# EAGLE board AlphanumericDisplay (EAGLE 7.6.0)
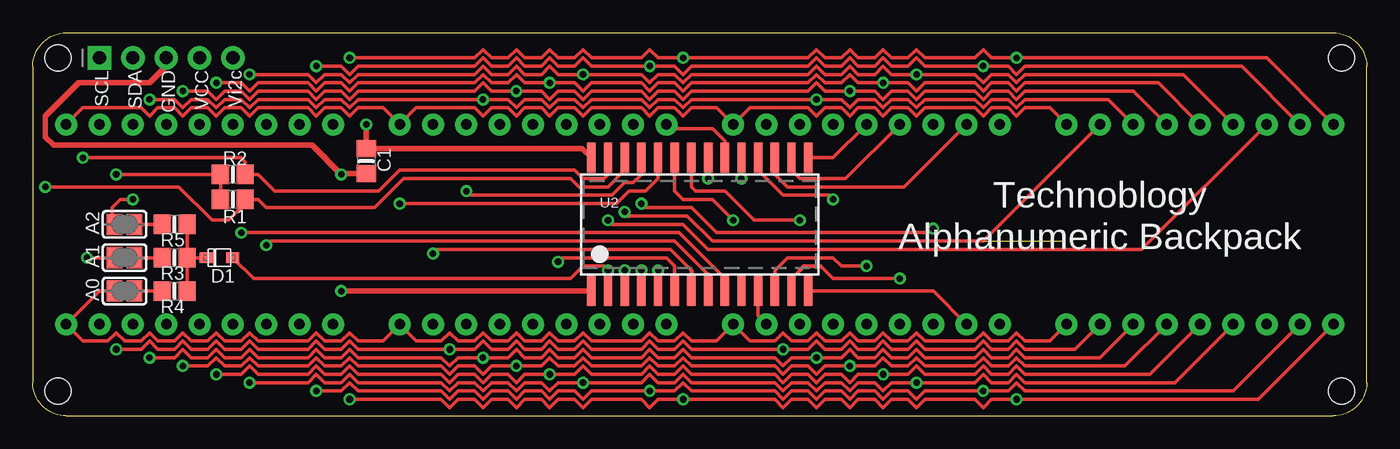
[diagram p0: board, top side]
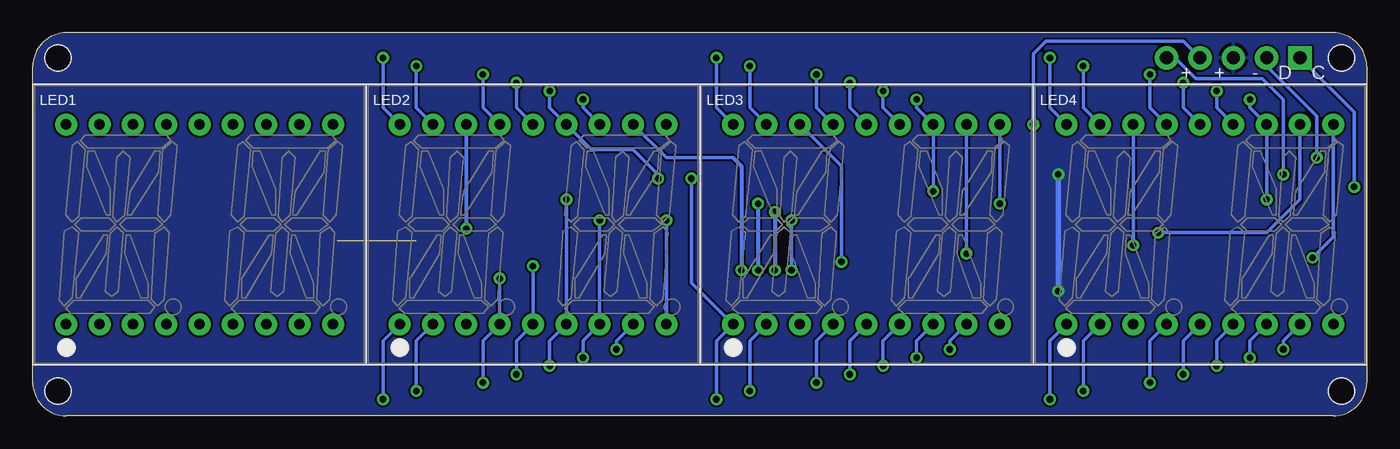
[diagram p1: board, bottom side, seen from below]

Size 101.6 x 29.21 mm. Coordinates in mm from the lower left corner, seen from the top.
Outline: 0,26.67 arc-90 2.54,29.21 99.06,29.21 arc-90 101.6,26.67 101.6,2.54 arc-90 99.06,0 2.54,0 arc-90 0,2.54 0,26.67
Copper layers (1*16): Top 0.035mm / dielectric 1.5mm / Bottom 0.035mm
Design rules "default *": minimum track width 8mil, minimum drill 15mil, track to track 6mil, track to pad 8mil, pad to pad 8mil, via to via 8mil, smd to smd 8mil, copper to edge 1mil, drill to drill 8mil, minimum pad ring 10mil, minimum via ring 8mil, stop-mask expansion 4mil, vias tented up to drill 20mil, thermal gap 10mil
Holes 2 mm at 1.91,1.91 99.69,1.91 1.91,27.3 99.69,27.3

## Footprints (pad centres in the part's own frame; a part is rotated, then mirrored left to right if it is on the bottom)
SOLDERJUMPER_REFLOW_NOPASTE = smd 1.168 x 1.6: 1 -0.762,0; 2 0.762,0
0805-NO = smd 1.3 x 1.5: 1 -0.95,0; 2 0.95,0
SOD-323F = smd 1 x 0.8: A -1,0; C 1,0
1X05_ROUND_70 = drill 1 pad 1.778 square: 1 -5.08,0 | drill 1 pad 1.778: 2 -2.54,0; 3 0,0; 4 2.54,0; 5 5.08,0
SEGMENT_STARTBUST_DUAL_KWA-541CBB = drill 0.8 pad 1.676: 1 -10.16,-7.62; 2 -7.62,-7.62; 3 -5.08,-7.62; 4 -2.54,-7.62; 5 0,-7.62; 6 2.54,-7.62; 7 5.08,-7.62; 8 7.62,-7.62; 9 10.16,-7.62; 10 10.16,7.62; 11 7.62,7.62; 12 5.08,7.62; 13 2.54,7.62; 14 0,7.62; 15 -2.54,7.62; 16 -5.08,7.62; 17 -7.62,7.62; 18 -10.16,7.62
SOP28_300MIL = smd 0.635 x 2.286: P$1 -8.255,-5.08; P$2 -6.985,-5.08; P$3 -5.715,-5.08; P$4 -4.445,-5.08; P$5 -3.175,-5.08; P$6 -1.905,-5.08; P$7 -0.635,-5.08; P$8 0.635,-5.08; P$9 1.905,-5.08; P$10 3.175,-5.08; P$11 4.445,-5.08; P$12 5.715,-5.08; P$13 6.985,-5.08; P$14 8.255,-5.08; P$15 8.255,5.08; P$16 6.985,5.08; P$17 5.715,5.08; P$18 4.445,5.08; P$19 3.175,5.08; P$20 1.905,5.08; P$21 0.635,5.08; P$22 -0.635,5.08; P$23 -1.905,5.08; P$24 -3.175,5.08; P$25 -4.445,5.08; P$26 -5.715,5.08; P$27 -6.985,5.08; P$28 -8.255,5.08

## Placement (x,y rotation side)
A0  [SOLDERJUMPER_REFLOW_NOPASTE]  6.99,9.53 180 top
A1  [SOLDERJUMPER_REFLOW_NOPASTE]  6.99,12.06 180 top
A2  [SOLDERJUMPER_REFLOW_NOPASTE]  6.99,14.61 180 top
C1  10uF  [0805-NO]  25.4,19.43 270 top
D1  1N4148  [SOD-323F]  14.22,12.06 180 top
JP1  [1X05_ROUND_70]  10.16,27.3 0 top
LED1  [SEGMENT_STARTBUST_DUAL_KWA-541CBB]  88.9,14.61 0 bottom
LED2  [SEGMENT_STARTBUST_DUAL_KWA-541CBB]  63.5,14.61 0 bottom
LED3  [SEGMENT_STARTBUST_DUAL_KWA-541CBB]  38.1,14.61 0 bottom
LED4  [SEGMENT_STARTBUST_DUAL_KWA-541CBB]  12.7,14.61 0 bottom
R1  10K  [0805-NO]  15.24,16.51 0 top
R2  10K  [0805-NO]  15.24,18.41 0 top
R3  47K  [0805-NO]  10.79,12.06 180 top
R4  47K  [0805-NO]  10.79,9.53 180 top
R5  47K  [0805-NO]  10.79,14.61 180 top
U2  [SOP28_300MIL]  50.8,14.61 0 top

## Library data of the parts
A0 A1 A2 C1 JP1 LED1-LED4 R1-R5 U2 = microbuilder
D1 = adafruit

## Nets
A0: A0.2 LED1.9 LED2.9 LED3.9 LED4.9 U2.P$23
A1: A1.2 LED1.10 LED2.10 LED3.10 LED4.10 U2.P$24
A2: A2.2 LED1.12 LED2.12 LED3.12 LED4.12 U2.P$25
COM0: D1.A LED1.16 U2.P$2
COM1: LED1.11 U2.P$3
COM2: LED2.16 U2.P$4
COM3: LED2.11 U2.P$5
COM4: LED3.16 U2.P$6
COM5: LED3.11 U2.P$7
GND: C1.2 JP1.3 U2.P$1
N$1: D1.C R3.1 R4.1 R5.1
N$2: JP1.5 R1.1 R2.1
N$4: LED1.17 LED2.17 LED3.17 LED4.17 U2.P$17
N$5: LED1.15 LED2.15 LED3.15 LED4.15 U2.P$16
N$6: LED1.14 LED2.14 LED3.14 LED4.14 U2.P$15
N$7: A2.1 R5.2
N$8: LED1.2 LED2.2 LED3.2 LED4.2 U2.P$14
N$9: LED1.4 LED2.4 LED3.4 LED4.4 U2.P$13
N$10: LED1.7 LED2.7 LED3.7 LED4.7 U2.P$22
N$11: LED1.1 LED2.1 LED3.1 LED4.1 U2.P$21
N$12: LED1.18 LED2.18 LED3.18 LED4.18 U2.P$20
N$13: LED1.13 LED2.13 LED3.13 LED4.13 U2.P$19
N$14: LED1.5 LED2.5 LED3.5 LED4.5 U2.P$12
N$15: LED1.8 LED2.8 LED3.8 LED4.8 U2.P$11
N$16: LED1.6 LED2.6 LED3.6 LED4.6 U2.P$18
N$19: A1.1 R3.2
N$20: A0.1 R4.2
N$23: LED4.16 U2.P$8
N$24: LED4.11 U2.P$9
SCL: JP1.1 R1.2 U2.P$26
SDA: JP1.2 R2.2 U2.P$27
VDD: C1.1 JP1.4 U2.P$28

## Tracks (layer width: path | path; a pad name or v marks a point on that pad's centre or on a via)
A0  (via drill 0.5)
  Top 0.254: LED1.9 77.47,5.71 75.56,5.71 74.93,6.35 74.3,5.71 73.03,5.71 72.39,6.35 71.75,5.71 67.94,5.71 67.31,6.35 66.67,5.71 65.41,5.71 64.77,6.35 64.14,5.71 62.87,5.71 62.23,6.35 61.59,5.71 60.33,5.71 59.69,6.35 59.05,5.71 57.78,5.71 57.15,6.35 56.52,5.71 54.61,5.71 LED2.9 52.07,5.71 50.16,5.71 49.53,6.35 48.9,5.71 47.62,5.71 46.99,6.35 46.35,5.71 42.55,5.71 41.91,6.35 41.27,5.71 40.01,5.71 39.37,6.35 38.73,5.71 37.47,5.71 36.83,6.35 36.2,5.71 34.92,5.71 34.29,6.35 33.66,5.71 32.38,5.71 31.75,6.35 31.11,5.71 29.21,5.71 LED3.9 26.67,5.71 24.77,5.71 24.13,6.35 23.5,5.71 22.23,5.71 21.59,6.35 20.95,5.71 17.14,5.71 16.51,6.35 15.88,5.71 14.61,5.71 13.97,6.35 13.34,5.71 12.06,5.71 11.43,6.35 10.79,5.71 9.53,5.71 8.89,6.35 8.26,5.71 6.99,5.71 6.35,6.35 5.71,5.71 3.81,5.71 LED4.9 5.08,9.53 A0.2 | U2.P$23 48.9,17.14 49.53,16.51 51.75,16.51 v53.34,14.92
  Bottom 0.254: v53.34,14.92 LED2.9
A1  (via drill 0.5)
  Top 0.254: LED4.10 3.81,23.5 8.26,23.5 8.89,22.86 9.53,23.5 10.79,23.5 11.43,22.86 12.06,23.5 13.34,23.5 13.97,22.86 14.61,23.5 15.88,23.5 16.51,22.86 17.14,23.5 20.95,23.5 21.59,22.86 22.23,23.5 23.5,23.5 24.13,22.86 24.77,23.5 26.67,23.5 LED3.10 29.21,23.5 33.66,23.5 34.29,22.86 34.92,23.5 36.2,23.5 36.83,22.86 37.47,23.5 38.73,23.5 39.37,22.86 40.01,23.5 41.27,23.5 41.91,22.86 42.55,23.5 46.35,23.5 46.99,22.86 47.62,23.5 48.9,23.5 49.53,22.86 50.16,23.5 52.07,23.5 LED2.10 54.61,23.5 59.05,23.5 59.69,22.86 60.33,23.5 61.59,23.5 62.23,22.86 62.87,23.5 64.14,23.5 64.77,22.86 65.41,23.5 66.67,23.5 67.31,22.86 67.94,23.5 71.75,23.5 72.39,22.86 73.03,23.5 74.3,23.5 74.93,22.86 75.56,23.5 77.47,23.5 LED1.10 | v27.94,16.19 44.45,16.19 45.4,17.14 46.67,17.14 47.62,18.1 U2.P$24 | A1.2 v4.13,12.06
  Bottom 0.254: v27.94,16.19 LED3.10 | v4.13,12.06 2.54,13.65 LED4.10
A2  (via drill 0.5)
  Top 0.254: 6.48,14.61 A2.2 6.03,14.8 6.03,15.88 6.67,16.51 v7.62,16.51 | v8.89,24.13 10.79,24.13 11.43,23.5 12.06,24.13 13.34,24.13 13.97,23.5 14.61,24.13 15.88,24.13 16.51,23.5 17.14,24.13 20.95,24.13 21.59,23.5 22.23,24.13 23.5,24.13 24.13,23.5 24.77,24.13 v34.29,24.13 36.2,24.13 36.83,23.5 37.47,24.13 38.73,24.13 39.37,23.5 40.01,24.13 41.27,24.13 41.91,23.5 42.55,24.13 46.35,24.13 46.99,23.5 47.62,24.13 48.9,24.13 49.53,23.5 50.16,24.13 v59.69,24.13 61.59,24.13 62.23,23.5 62.87,24.13 64.14,24.13 64.77,23.5 65.41,24.13 66.67,24.13 67.31,23.5 67.94,24.13 71.75,24.13 72.39,23.5 73.03,24.13 74.3,24.13 74.93,23.5 75.56,24.13 81.92,24.13 LED1.12 | U2.P$25 46.35,18.41 45.72,17.78 45.09,17.78 44.13,16.83 33.34,16.83 v33.02,17.14
  Bottom 0.254: LED2.12 59.69,23.5 v59.69,24.13 | v34.29,24.13 34.29,23.5 LED3.12 v33.02,17.14 | v8.89,24.13 8.89,23.5 LED4.12 v7.62,16.51
COM0  (via drill 0.5)
  Top 0.254: v43.81,14.92 44.13,14.61 49.53,14.61 51.44,12.7 83.82,12.7 84.45,12.7 LED1.16 | U2.P$2 v43.81,11.11 43.5,11.43 41.91,11.43 40.96,10.48 16.81,10.48 D1.A
  Bottom 0.254: v43.81,14.92 v43.81,11.11
COM1  (via drill 0.5)  (1 unrouted)
  Top 0.254: 45.4,15.24 49.85,15.24 51.75,13.34 72.39,13.34 LED1.11
  Top 0.305: 45.4,15.24 v45.09,15.56 | v45.09,11.11 U2.P$3
  Bottom 0.305: v45.09,15.56 v45.09,11.11
COM2  (via drill 0.5)
  Top 0.254: v46.35,16.19 46.67,15.88 50.16,15.88 52.07,13.97 68.26,13.97 v68.58,14.29
  Top 0.305: v46.35,11.11 U2.P$4
  Bottom 0.305: LED2.16 v68.58,14.29 | v46.35,16.19 v46.35,11.11
COM3  (via drill 0.5)
  Top 0.305: v47.62,11.11 U2.P$5
  Bottom 0.254: LED2.11 53.34,19.68 48.26,19.68
  Bottom 0.305: 48.26,19.68 47.62,19.05 v47.62,11.11
COM4  (via drill 0.5)
  Top 0.254: U2.P$6 48.9,11.43 48.26,12.06 40.32,12.06 v40.01,11.75
  Bottom 0.254: LED3.16 40.01,19.05 v40.01,11.75
COM5  (via drill 0.5)
  Top 0.254: 50.16,11.11 48.58,12.7 30.8,12.7 v30.48,12.38
  Top 0.305: 50.16,11.11 U2.P$7
  Bottom 0.254: LED3.11 v30.48,12.38
GND  (via drill 0.5)
  Top 0.406: C1.2 23.56,18.48 v23.5,18.41 21.27,20.64 1.59,20.64 0.95,21.27 0.95,22.86 3.49,25.4 8.89,25.4 10.16,26.67 JP1.3 | v23.5,9.53 U2.P$1
  Bottom 0.406: v23.5,18.41 v23.5,9.53
  pour Bottom: -0.13,29.27 -0.13,-0.06 101.66,-0.06 101.66,29.27
N$1
  Top 0.254: R3.1 D1.C | R5.1 R3.1 | R3.1 R4.1
N$2  (via drill 0.5)
  Top 0.254: R1.1 14.29,17.78 | 14.29,17.78 R2.1 v6.35,18.41 | 13.97,18.1 14.29,17.78
  Bottom 0.254: JP1.5 14.61,27.3 13.02,25.72 7.94,25.72 6.35,24.13 v6.35,18.41
N$4  (via drill 0.5)
  Top 0.254: v21.59,26.67 23.5,26.67 24.13,26.04 24.77,26.67 33.66,26.67 34.29,27.3 34.92,26.67 36.2,26.67 36.83,27.3 37.47,26.67 38.73,26.67 39.37,27.3 40.01,26.67 41.27,26.67 41.91,27.3 42.55,26.67 v46.99,26.67 48.9,26.67 49.53,26.04 50.16,26.67 59.05,26.67 59.69,27.3 60.33,26.67 61.59,26.67 62.23,27.3 62.87,26.67 64.14,26.67 64.77,27.3 65.41,26.67 66.67,26.67 67.31,27.3 67.94,26.67 v72.39,26.67 74.3,26.67 74.93,26.04 75.56,26.67 92.08,26.67 LED1.17 | 56.52,18.41 57.47,17.46 66.36,17.46 LED2.17
  Top 0.305: U2.P$17 56.52,18.41
  Bottom 0.254: LED2.17 72.39,23.5 v72.39,26.67 | LED3.17 46.99,23.5 v46.99,26.67 | LED4.17 21.59,23.5 v21.59,26.67
N$5  (via drill 0.5)
  Top 0.254: v16.51,26.04 20.95,26.04 21.59,25.4 22.23,26.04 23.5,26.04 24.13,25.4 24.77,26.04 33.66,26.04 34.29,26.67 34.92,26.04 36.2,26.04 36.83,26.67 37.47,26.04 38.73,26.04 39.37,26.67 40.01,26.04 v41.91,26.04 46.35,26.04 46.99,25.4 47.62,26.04 48.9,26.04 49.53,25.4 50.16,26.04 59.05,26.04 59.69,26.67 60.33,26.04 61.59,26.04 62.23,26.67 62.87,26.04 64.14,26.04 64.77,26.67 65.41,26.04 v67.31,26.04 71.75,26.04 72.39,25.4 73.03,26.04 74.3,26.04 74.93,25.4 75.56,26.04 87.63,26.04 LED1.15 | LED2.15 61.91,18.1 58.42,18.1 57.78,18.73 U2.P$16
  Bottom 0.254: LED2.15 67.31,23.5 v67.31,26.04 | LED3.15 41.91,23.5 v41.91,26.04 | LED4.15 16.51,23.5 v16.51,26.04
N$6  (via drill 0.5)
  Top 0.254: v13.97,25.4 15.88,25.4 16.51,24.77 17.14,25.4 20.95,25.4 21.59,24.77 22.23,25.4 23.5,25.4 24.13,24.77 24.77,25.4 33.66,25.4 34.29,26.04 34.92,25.4 36.2,25.4 36.83,26.04 37.47,25.4 v39.37,25.4 41.27,25.4 41.91,24.77 42.55,25.4 46.35,25.4 46.99,24.77 47.62,25.4 48.9,25.4 49.53,24.77 50.16,25.4 59.05,25.4 59.69,26.04 60.33,25.4 61.59,25.4 62.23,26.04 62.87,25.4 v64.77,25.4 66.67,25.4 67.31,24.77 67.94,25.4 71.75,25.4 72.39,24.77 73.03,25.4 74.3,25.4 74.93,24.77 75.56,25.4 85.72,25.4 LED1.14 | LED2.14 60.96,19.68 U2.P$15
  Bottom 0.254: LED2.14 64.77,23.5 v64.77,25.4 | LED3.14 39.37,23.5 v39.37,25.4 | LED4.14 13.97,23.5 v13.97,25.4
N$7
  Top 0.254: A2.1 R5.2
N$8  (via drill 0.5)
  Top 0.254: v21.59,1.91 23.5,1.91 24.13,2.54 24.77,1.91 31.11,1.91 31.75,1.27 32.38,1.91 33.66,1.91 34.29,1.27 34.92,1.91 36.2,1.91 36.83,1.27 37.47,1.91 38.73,1.91 39.37,1.27 40.01,1.91 41.27,1.91 41.91,1.27 42.55,1.91 v46.99,1.91 48.9,1.91 49.53,2.54 50.16,1.91 56.52,1.91 57.15,1.27 57.78,1.91 59.05,1.91 59.69,1.27 60.33,1.91 61.59,1.91 62.23,1.27 62.87,1.91 64.14,1.91 64.77,1.27 65.41,1.91 66.67,1.91 67.31,1.27 67.94,1.91 v72.39,1.91 74.3,1.91 74.93,2.54 75.56,1.91 91.44,1.91 LED1.2 | U2.P$14 68.58,9.53 LED2.2
  Bottom 0.254: LED4.2 21.59,5.71 v21.59,1.91 | LED3.2 46.99,5.71 v46.99,1.91 | LED2.2 72.39,5.71 v72.39,1.91
N$9  (via drill 0.5)
  Top 0.254: v16.51,2.54 20.95,2.54 21.59,3.17 22.23,2.54 23.5,2.54 24.13,3.17 24.77,2.54 31.11,2.54 31.75,1.91 32.38,2.54 33.66,2.54 34.29,1.91 34.92,2.54 36.2,2.54 36.83,1.91 37.47,2.54 38.73,2.54 39.37,1.91 40.01,2.54 v41.91,2.54 46.35,2.54 46.99,3.17 47.62,2.54 48.9,2.54 49.53,3.17 50.16,2.54 56.52,2.54 57.15,1.91 57.78,2.54 59.05,2.54 59.69,1.91 60.33,2.54 61.59,2.54 62.23,1.91 62.87,2.54 64.14,2.54 64.77,1.91 65.41,2.54 v67.31,2.54 71.75,2.54 72.39,3.17 73.03,2.54 74.3,2.54 74.93,3.17 75.56,2.54 87,2.54 LED1.4 | U2.P$13 57.78,10.48 58.42,11.11 | 60.01,11.43 60.96,10.48 v66.04,10.48
  Top 0.305: 58.42,11.11 58.74,11.43 60.01,11.43
  Bottom 0.254: LED4.4 16.51,5.71 v16.51,2.54 | LED3.4 41.91,5.71 v41.91,2.54 | v67.31,2.54 67.31,5.71 LED2.4 v66.04,10.48
N$10  (via drill 0.5)
  Top 0.254: v8.89,4.45 10.79,4.45 11.43,5.08 12.06,4.45 13.34,4.45 13.97,5.08 14.61,4.45 15.88,4.45 16.51,5.08 17.14,4.45 20.95,4.45 21.59,5.08 22.23,4.45 23.5,4.45 24.13,5.08 24.77,4.45 31.11,4.45 31.75,3.81 32.38,4.45 v34.29,4.45 36.2,4.45 36.83,5.08 37.47,4.45 38.73,4.45 39.37,5.08 40.01,4.45 41.27,4.45 41.91,5.08 42.55,4.45 46.35,4.45 46.99,5.08 47.62,4.45 48.9,4.45 49.53,5.08 50.16,4.45 56.52,4.45 57.15,3.81 57.78,4.45 v59.69,4.45 61.59,4.45 62.23,5.08 62.87,4.45 64.14,4.45 64.77,5.08 65.41,4.45 66.67,4.45 67.31,5.08 67.94,4.45 71.75,4.45 72.39,5.08 73.03,4.45 74.3,4.45 74.93,5.08 75.56,4.45 81.28,4.45 LED1.7 | U2.P$22 50.16,17.46 50.48,17.14 52.7,17.14 54.93,14.92 v58.42,14.92
  Bottom 0.254: LED4.7 8.89,5.71 v8.89,4.45 | LED3.7 34.29,5.71 v34.29,4.45 | v59.69,4.45 59.69,5.71 LED2.7 v58.42,14.92
N$11  (via drill 0.5)
  Top 0.254: v24.13,1.27 31.11,1.27 31.75,0.64 32.38,1.27 33.66,1.27 34.29,0.64 34.92,1.27 36.2,1.27 36.83,0.64 37.47,1.27 38.73,1.27 39.37,0.64 40.01,1.27 41.27,1.27 41.91,0.64 42.55,1.27 46.35,1.27 46.99,0.64 47.62,1.27 v49.53,1.27 56.52,1.27 57.15,0.64 57.78,1.27 59.05,1.27 59.69,0.64 60.33,1.27 61.59,1.27 62.23,0.64 62.87,1.27 64.14,1.27 64.77,0.64 65.41,1.27 66.67,1.27 67.31,0.64 67.94,1.27 71.75,1.27 72.39,0.64 73.03,1.27 v74.93,1.27 93.34,1.27 LED1.1 | U2.P$21 v51.44,18.1
  Bottom 0.254: LED4.1 24.13,5.71 v24.13,1.27 | v49.53,1.27 49.53,5.71 LED3.1 51.44,10.16 v51.44,18.1 | LED2.1 74.93,5.71 v74.93,1.27
N$12  (via drill 0.5)
  Top 0.254: v24.13,27.3 33.66,27.3 34.29,27.94 34.92,27.3 36.2,27.3 36.83,27.94 37.47,27.3 38.73,27.3 39.37,27.94 40.01,27.3 41.27,27.3 41.91,27.94 42.55,27.3 46.35,27.3 46.99,27.94 47.62,27.3 v49.53,27.3 59.05,27.3 59.69,27.94 60.33,27.3 61.59,27.3 62.23,27.94 62.87,27.3 64.14,27.3 64.77,27.94 65.41,27.3 66.67,27.3 67.31,27.94 67.94,27.3 71.75,27.3 72.39,27.94 73.03,27.3 v74.93,27.3 93.98,27.3 LED1.18 | LED3.18 48.58,21.91 51.75,21.91 52.7,20.95 U2.P$20
  Bottom 0.254: LED2.18 74.93,23.5 v74.93,27.3 | LED3.18 49.53,23.5 v49.53,27.3 | LED4.18 24.13,23.5 v24.13,27.3
N$13  (via drill 0.5)
  Top 0.254: v11.43,24.77 13.34,24.77 13.97,24.13 14.61,24.77 15.88,24.77 16.51,24.13 17.14,24.77 20.95,24.77 21.59,24.13 22.23,24.77 23.5,24.77 24.13,24.13 24.77,24.77 33.66,24.77 34.29,25.4 34.92,24.77 v36.83,24.77 38.73,24.77 39.37,24.13 40.01,24.77 41.27,24.77 41.91,24.13 42.55,24.77 46.35,24.77 46.99,24.13 47.62,24.77 48.9,24.77 49.53,24.13 50.16,24.77 59.05,24.77 59.69,25.4 60.33,24.77 v62.23,24.77 64.14,24.77 64.77,24.13 65.41,24.77 66.67,24.77 67.31,24.13 67.94,24.77 71.75,24.77 72.39,24.13 73.03,24.77 74.3,24.77 74.93,24.13 75.56,24.77 83.82,24.77 LED1.13 | U2.P$19 v53.98,18.1
  Bottom 0.254: v62.23,24.77 62.23,23.5 LED2.13 59.05,20.32 55.88,20.32 53.98,18.41 v53.98,18.1 | LED3.13 36.83,23.5 v36.83,24.77 | LED4.13 11.43,23.5 v11.43,24.77
N$14  (via drill 0.5)
  Top 0.254: v13.97,3.17 15.88,3.17 16.51,3.81 17.14,3.17 20.95,3.17 21.59,3.81 22.23,3.17 23.5,3.17 24.13,3.81 24.77,3.17 31.11,3.17 31.75,2.54 32.38,3.17 33.66,3.17 34.29,2.54 34.92,3.17 36.2,3.17 36.83,2.54 37.47,3.17 v39.37,3.17 41.27,3.17 41.91,3.81 42.55,3.17 46.35,3.17 46.99,3.81 47.62,3.17 48.9,3.17 49.53,3.81 50.16,3.17 56.52,3.17 57.15,2.54 57.78,3.17 59.05,3.17 59.69,2.54 60.33,3.17 61.59,3.17 62.23,2.54 62.87,3.17 v64.77,3.17 66.67,3.17 67.31,3.81 67.94,3.17 71.75,3.17 72.39,3.81 73.03,3.17 74.3,3.17 74.93,3.81 75.56,3.17 85.09,3.17 LED1.5 | U2.P$12 56.52,11.11 57.47,12.06 60.96,12.06 61.59,11.43 v63.5,11.43
  Bottom 0.254: LED4.5 13.97,5.71 v13.97,3.17 | LED3.5 39.37,5.71 v39.37,3.17 | v64.77,3.17 64.77,5.71 LED2.5 v63.5,11.43
N$15  (via drill 0.5)
  Top 0.254: v6.35,5.08 8.26,5.08 8.89,5.71 9.53,5.08 10.79,5.08 11.43,5.71 12.06,5.08 13.34,5.08 13.97,5.71 14.61,5.08 15.88,5.08 16.51,5.71 17.14,5.08 20.95,5.08 21.59,5.71 22.23,5.08 23.5,5.08 24.13,5.71 24.77,5.08 v31.75,5.08 33.66,5.08 34.29,5.71 34.92,5.08 36.2,5.08 36.83,5.71 37.47,5.08 38.73,5.08 39.37,5.71 40.01,5.08 41.27,5.08 41.91,5.71 42.55,5.08 46.35,5.08 46.99,5.71 47.62,5.08 48.9,5.08 49.53,5.71 50.16,5.08 v57.15,5.08 59.05,5.08 59.69,5.71 60.33,5.08 61.59,5.08 62.23,5.71 62.87,5.08 64.14,5.08 64.77,5.71 65.41,5.08 66.67,5.08 67.31,5.71 67.94,5.08 71.75,5.08 72.39,5.71 73.03,5.08 74.3,5.08 74.93,5.71 75.56,5.08 79.38,5.08 LED1.8 | LED2.8 55.24,7.62 U2.P$11
  Bottom 0.254: LED4.8 6.35,5.71 v6.35,5.08 | LED3.8 31.75,5.71 v31.75,5.08 | LED2.8 57.15,5.71 v57.15,5.08
N$16  (via drill 0.5)
  Top 0.254: v11.43,3.81 13.34,3.81 13.97,4.45 14.61,3.81 15.88,3.81 16.51,4.45 17.14,3.81 20.95,3.81 21.59,4.45 22.23,3.81 23.5,3.81 24.13,4.45 24.77,3.81 31.11,3.81 31.75,3.17 32.38,3.81 33.66,3.81 34.29,3.17 34.92,3.81 v36.83,3.81 38.73,3.81 39.37,4.45 40.01,3.81 41.27,3.81 41.91,4.45 42.55,3.81 46.35,3.81 46.99,4.45 47.62,3.81 48.9,3.81 49.53,4.45 50.16,3.81 56.52,3.81 57.15,3.17 57.78,3.81 59.05,3.81 59.69,3.17 60.33,3.81 v62.23,3.81 64.14,3.81 64.77,4.45 65.41,3.81 66.67,3.81 67.31,4.45 67.94,3.81 71.75,3.81 72.39,4.45 73.03,3.81 74.3,3.81 74.93,4.45 75.56,3.81 83.19,3.81 LED1.6 | U2.P$18 55.24,18.73 57.15,16.83 60.64,16.83 v60.96,16.51
  Bottom 0.254: v36.83,3.81 36.83,5.71 LED3.6 | LED4.6 11.43,5.71 v11.43,3.81 | v62.23,3.81 62.23,5.71 LED2.6 v60.96,16.51
N$19
  Top 0.254: A1.1 R3.2
N$20
  Top 0.254: A0.1 R4.2
N$23  (via drill 0.5)
  Top 0.254: 51.44,10.79 48.9,13.34 18.1,13.34 v17.78,13.02
  Top 0.305: 51.44,10.79 U2.P$8
  Bottom 0.254: LED4.16 v17.78,13.02
N$24  (via drill 0.5)
  Top 0.254: v15.88,13.97 49.21,13.97 52.7,10.48
  Top 0.305: 52.7,10.48 U2.P$9
  Bottom 0.254: LED4.11 5.08,16.51 7.62,13.97 v15.88,13.97
SCL  (via drill 0.5)
  Top 0.254: R1.2 17.14,16.51 17.78,15.88 26.04,15.88 28.26,18.1 40.96,18.1 41.59,17.46 43.81,17.46 45.09,18.73 U2.P$26 | R1.2 | v0.95,17.46 11.11,17.46 13.65,14.92 14.92,14.92 16.19,16.19 R1.2
  Bottom 0.254: v0.95,17.46 0.95,23.18 JP1.1
SDA  (via drill 0.5)
  Top 0.254: v3.81,19.68 15.88,19.68 16.19,19.37 R2.2 17.14,18.41 18.41,17.14 26.35,17.14 27.94,18.73 41.27,18.73 41.91,18.1 43.5,18.1 43.81,18.41 U2.P$27
  Bottom 0.254: JP1.2 7.62,26.67 3.81,22.86 v3.81,19.68
VDD  (via drill 0.5)
  Top 0.406: U2.P$28 41.85,20.38 C1.1 v25.4,22.23
  Bottom 0.254: v25.4,22.23 25.4,27.62 24.45,28.57 13.97,28.57 JP1.4

## Text on the board
tPlace: SCL | SDA | GND | VCC | Vi2c | Technoblogy | A2 | Alphanumeric Backpack | A1 | A0
bPlace: C | D | - | + | +